# Altium PCB 电子脚铐便携式主控板V3-改版.PcbDoc (part 3 of 3)
Units mm, origin at the board's own origin, x right, y up, seen from the top; angles counter-clockwise.
Board outline 54 x 110 mm, 2 copper layers (Top Layer, Bottom Layer), stack 1.671 mm thick; 103 components, 64 nets, 340 pads, 43 vias.
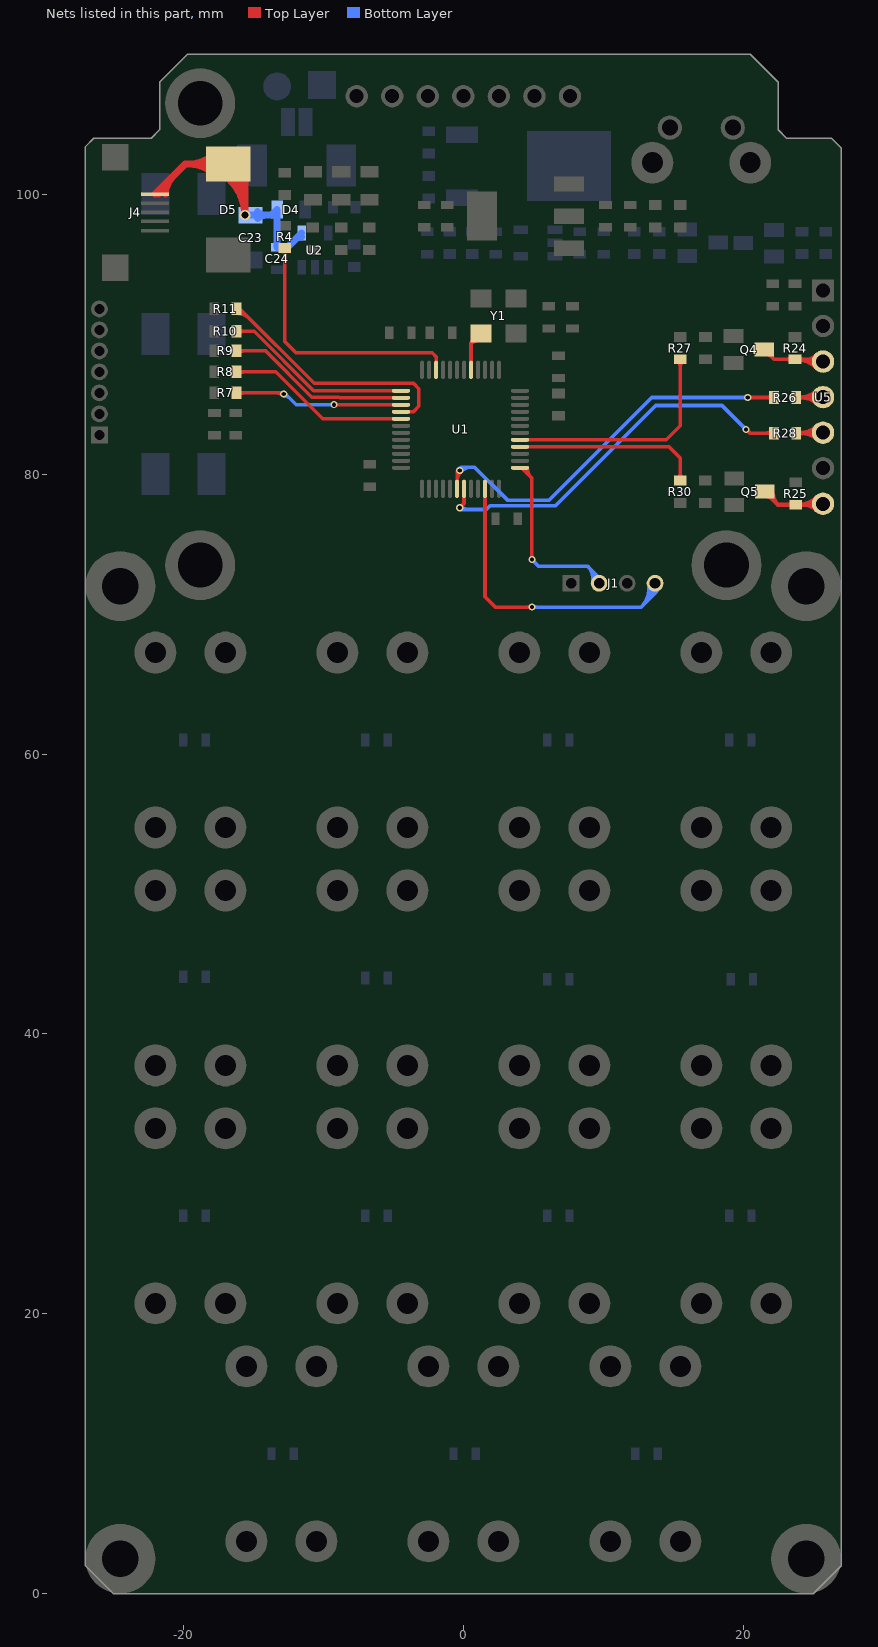
[diagram p3: the nets of this part, all layers, seen from the top]

## Via types
v1: diameter 0.508, hole 0.305, Top Layer to Bottom Layer, tented both sides, 29 vias
v2: diameter 0.762, hole 0.508, Top Layer to Bottom Layer, tented both sides, 14 vias

## Nets (pads, with @x,y where several pads share a name; then routed paths per layer and width w, separated by ;. In a path a pad name is that pad's centre, name@x,y a point inside that pad or via, vN(x,y) a via of type N, cw(c..) or ccw(c..) an arc to the next point about the centre after c; other vN are vias at no path point) (continued)
SETA: R27.2 U1.41 | length 17.5
  Top Layer w0.254: U1.41@4.05,82.45 14.505,82.45 15.5,83.445 R27.2@15.5,88.2 ; R27.2@15.342,88.042 cw(c14.962,87.662) 15.5,87.662 cw(c16.038,87.662) R27.2@15.658,88.042
SETAOUT: Q4.3 R24.1 U5.3 | length 11
  Top Layer w0.254: Q4.3@21.5,88.9 22.2,88.2 ; Q4.3@21.7,88.527 cw(c21.7,88.109) Q4.3@21.995,88.405 ; Q4.3@22.056,88.788 ccw(c22.613,88.613) 22.2,88.2 ; R24.1@23.442,88.042 ccw(c23.062,87.662) 23.062,88.2 ccw(c23.062,88.738) R24.1@23.442,88.358 ; R24.1@23.7,88.2 cw(c23.7,86.056) U5.3@25.222,87.566 ; R24.1@23.958,88.042 cw(c24.338,87.662) 24.338,88.2 cw(c24.338,88.738) R24.1@23.958,88.358 ; 24.31,88.2 cw(c24.31,86.661) U5.3@25.403,87.745 ; 24.462,88.2 ccw(c24.462,89.278) U5.3@25.224,88.516 ; U5.3@25.7,88.04 25.54,88.2 R24.1@23.7,88.2 22.2,88.2
SETB: R30.2 U1.40 | length 14.1
  Top Layer w0.254: U1.40@4.05,81.95 14.697,81.95 15.5,81.147 R30.2@15.5,79.7 ; R30.2@15.336,79.698 ccw(c14.941,80.093) 15.5,80.093 ; 15.5,80.064 ccw(c16.018,80.064) R30.2@15.652,79.698
SETBOUT: Q5.3 R25.1 U5.7 | length 10.7
  Top Layer w0.305: Q5.3@21.547,78.74 22.474,77.813 ; Q5.3@21.747,78.392 cw(c21.747,78.036) Q5.3@21.999,78.288 ; Q5.3@22.095,78.738 ccw(c23.39,78.729) 22.474,77.813 ; R25.1@23.509,77.673 ccw(c23.172,77.336) 23.172,77.813 ccw(c23.172,78.29) R25.1@23.509,77.953 ; R25.1@23.975,77.813 ccw(c23.975,79.605) U5.7@25.242,78.338 ; R25.1@23.989,77.673 cw(c24.326,77.336) 24.326,77.813 cw(c24.326,78.29) R25.1@23.989,77.953 ; 24.298,77.813 cw(c24.298,76.478) U5.7@25.242,77.422 ; 24.711,77.813 ccw(c24.711,78.869) U5.7@25.458,78.122 ; U5.7@25.7,77.88 25.633,77.813 R25.1@23.749,77.813 22.474,77.813
SPARE1: R4.2 U1.10 | length 19.7
  Top Layer w0.254: R4.2@-12.92,95.989 cw(c-13.3,95.609) -12.762,95.609 cw(c-12.224,95.609) R4.2@-12.604,95.989 ; R4.2@-12.762,96.147 -12.762,89.47 -11.96,88.668 -2.225,88.668 -1.95,88.393 U1.10@-1.95,87.45
SPI_DC: R10.1 U1.13 | length 14.4
  Top Layer w0.254: R10.1@-16.2,90.2 -14.949,90.2 -10.699,85.95 U1.13@-4.45,85.95 ; R10.1@-16.042,90.042 cw(c-15.662,89.662) -15.662,90.2 cw(c-15.662,90.738) R10.1@-16.042,90.358
SPI_MISO: R11.1 U1.16 | length 19.7
  Top Layer w0.254: R11.1@-16.2,91.477 cw(c-16.2,90.153) -15.264,91.089 ; R11.1@-16.2,91.731 cw(c-16.2,91.02) -15.697,91.523 ; R11.1@-16.2,91.8 -15.975,91.8 -10.662,86.487 -3.556,86.487 -3.175,86.106 -3.175,84.836 -3.561,84.45 U1.16@-4.45,84.45
SPI_MOSI: R8.1 U1.17 | length 14
  Top Layer w0.254: R8.1@-16.2,87.3 -13.4,87.3 -10.05,83.95 U1.17@-4.45,83.95 ; R8.1@-16.042,87.142 cw(c-15.662,86.762) -15.662,87.3 cw(c-15.662,87.838) R8.1@-16.042,87.458
SPI_RES: R9.1 U1.14 | length 14
  Top Layer w0.254: R9.1@-16.2,88.8 -14.124,88.8 -10.82,85.496 -8.89,85.496 -8.844,85.45 U1.14@-4.45,85.45 ; R9.1@-16.042,88.642 cw(c-15.662,88.262) -15.662,88.8 cw(c-15.662,89.338) R9.1@-16.042,88.958
SPI_SCK: R7.1 U1.15 | length 15
  Top Layer w0.254: R7.1@-16.2,85.8 -12.902,85.8 v1(-12.827,85.725) ; R7.1@-16.042,85.642 cw(c-15.662,85.262) -15.662,85.8 cw(c-15.662,86.338) R7.1@-16.042,85.958 ; -13.315,85.8 cw(c-13.315,85.237) v1@-12.917,85.635 ; v1(-9.237,84.963) -9.25,84.95 U1.15@-4.45,84.95 ; v1@-9.147,84.873 cw(c-8.962,84.688) -8.962,84.95 ; v1@-9.147,85.053 ccw(c-8.899,85.301) -8.899,84.95
  Bottom Layer w0.254: v1@-12.827,85.598 cw(c-12.827,84.985) -12.393,85.418 ; v1(-12.827,85.725) -12.827,85.852 -11.938,84.963 v1(-9.237,84.963) ; v1@-9.327,84.873 ccw(c-9.544,84.656) -9.544,84.963 ccw(c-9.544,85.27) v1@-9.327,85.053
SWCLK: J1.2 U1.37 | length 16.9
  Top Layer w0.254: U1.37@4.05,80.45 4.15,80.45 4.9,79.7 v1(4.9,73.9) ; U1.37@4.319,80.45 ccw(c4.727,80.45) 4.439,80.161 ; U1.37@4.573,80.45 ccw(c5.594,80.45) 4.872,79.728 ; v1@4.81,73.99 ccw(c4.593,74.207) 4.9,74.207 ccw(c5.207,74.207) v1@4.99,73.99
  Bottom Layer w0.254: v1@4.9,73.773 cw(c4.9,73.466) 5.117,73.683 cw(c5.334,73.9) v1@5.027,73.9 ; v1(4.9,73.9) 5.4,73.4 8.9,73.4 ; 9.236,73.064 cw(c8.592,72.42) J1.2@9.485,72.243 ; J1.2@9.236,72.292 ccw(c8.032,72.532) 8.9,73.4 ; J1.2@9.7,72.2 9.7,72.6 8.9,73.4
SWDIO: J1.4 U1.34 | length 28
  Top Layer w0.254: U1.34@1.55,78.95 1.55,71.225 2.275,70.5 v1(4.9,70.5) ; v1@4.81,70.41 ccw(c4.593,70.193) 4.593,70.5 ccw(c4.593,70.807) v1@4.81,70.59
  Bottom Layer w0.254: v1(4.9,70.5) 12.7,70.5 ; v1@4.99,70.41 cw(c5.207,70.193) 5.207,70.5 cw(c5.207,70.807) v1@4.99,70.59 ; 13.054,70.854 ccw(c11.975,71.934) J1.4@13.484,72.167 ; J1.4@13.233,72.128 cw(c11.361,71.839) 12.7,70.5 ; 13.409,71.209 ccw(c12.589,72.028) J1.4@13.735,72.205 ; J1.4@13.524,71.761 cw(c13.419,71.5) 13.7,71.5 ; J1.4@13.7,72.2 13.7,71.5 ; 13.763,71.563 ccw(c13.202,72.123) J1.4@13.986,72.244 ; J1.4@13.876,71.761 ccw(c13.981,71.5) 13.7,71.5 ; 12.7,70.5 13.7,71.5
TTL1_RX: R28.2 U1.31 | length 30.7
  Top Layer w0.254: v1(-0.254,77.597) 0.05,77.901 U1.31@0.05,78.95 ; v1@-0.254,77.724 ccw(c-0.254,78.031) -0.037,77.814 ccw(c0.18,77.597) v1@-0.127,77.597 ; v1@20.193,83.058 cw(c20.193,82.679) 20.461,82.947 ; v1@20.208,83.2 20.477,82.931 R28.2@22.187,82.931 ; v1@20.32,83.185 ccw(c20.554,83.185) 20.389,83.019 ; R28.2@22.029,82.773 ccw(c21.649,82.393) 21.649,82.931 ccw(c21.649,83.469) R28.2@22.029,83.089
  Bottom Layer w0.254: v1(-0.254,77.597) -0.127,77.47 1.641,77.47 1.911,77.74 6.585,77.74 13.746,84.9 18.478,84.9 v1(20.193,83.185) ; v1@-0.164,77.687 ccw(c0.359,78.21) 0.359,77.47 ; v1@20.066,83.185 ccw(c19.759,83.185) 19.976,83.402 ccw(c20.193,83.619) v1@20.193,83.312
TTL1_TX: R26.2 U1.30 | length 32.5
  Top Layer w0.254: U1.30@-0.45,78.95 -0.45,80.068 ; U1.30@-0.45,79.484 cw(c0.526,79.484) v1@-0.164,80.174 ; -0.45,80.097 cw(c-0.087,80.097) v1@-0.344,80.354 ; v1@-0.381,80.255 cw(c-0.619,80.237) -0.45,80.068 ; v1@-0.263,80.137 ccw(c-0.281,79.899) -0.45,80.068 ; v1(-0.254,80.264) -0.45,80.068 ; v1(20.32,85.471) R26.2@22.187,85.471 ; v1@20.41,85.381 cw(c20.627,85.164) 20.627,85.471 cw(c20.627,85.778) v1@20.41,85.561 ; R26.2@22.029,85.313 ccw(c21.649,84.933) 21.649,85.471 ccw(c21.649,86.009) R26.2@22.029,85.629
  Bottom Layer w0.254: v1@-0.344,80.354 cw(c0.009,80.001) 0.009,80.5 ; v1(-0.254,80.264) -0.018,80.5 0.8,80.5 3.154,78.146 6.146,78.146 13.471,85.471 v1(20.32,85.471) ; v1@-0.164,80.174 cw(c0.622,79.388) 0.622,80.5 ; v1@20.23,85.381 ccw(c20.013,85.164) 20.013,85.471 ccw(c20.013,85.778) v1@20.23,85.561
VBUS: C23.1 C24.1 D4.1 D5.1 J4.1 U2.4 | length 33.8
  Top Layer w0.508: J4.1@-22.021,100 -19.871,102.15 D5.1@-16.8,102.15 -15.6,100.95 v2(-15.6,98.5) ; J4.1@-21.783,100 cw(c-21.208,100) -21.615,100.406 ; J4.1@-21.275,100 cw(c-19.474,100) -20.748,101.274 ; D5.1@-17.854,101.446 ccw(c-19.555,99.745) -19.555,102.15 ccw(c-19.555,104.555) D5.1@-17.854,102.854 ; D5.1@-17.057,101.36 cw(c-19.331,98.402) v2@-15.6,98.402 ; D5.1@-16.747,101.763 cw(c-18.538,99.434) -15.6,99.434 ; D5.1@-16.438,102.166 cw(c-17.745,100.465) -15.6,100.465
  Bottom Layer w0.508: v2(-15.6,98.5) -13.7,98.5 D4.1@-13.3,98.9 C24.1@-13.3,96.2 -12.575,96.2 U2.4@-11.55,97.225 ; C23.1@-14.705,98.255 cw(c-14.115,97.665) -14.115,98.5 cw(c-14.115,99.335) C23.1@-14.705,98.745 ; -14.015,98.5 ccw(c-14.015,99.365) D4.1@-13.403,98.753 ; -12.013,96.762 cw(c-11.55,96.3) U2.4@-11.55,96.954
XTAL: U1.5 Y1.3 | length 4.1
  Top Layer w0.305: U1.5@0.55,87.45 0.55,89.35 ; Y1.3@0.678,89.892 cw(c0.175,89.725) 0.55,89.35 ; Y1.3@1.108,89.554 ccw(c1.049,88.851) 0.55,89.35 ; Y1.3@1.25,90.05 0.55,89.35
YL_RX: R26.1 U5.4 | length 5.8
  Top Layer w0.305: R26.1@23.787,85.471 U5.4@25.671,85.471 ; R26.1@23.927,85.331 cw(c24.264,84.994) 24.264,85.471 cw(c24.264,85.948) R26.1@23.927,85.611 ; R26.1@24.067,85.471 ccw(c24.067,87.133) U5.4@25.242,85.958 ; 24.207,85.471 cw(c24.207,84.007) U5.4@25.242,85.042 ; 24.802,85.471 ccw(c24.802,86.398) U5.4@25.458,85.742
YL_TX: R28.1 U5.5 | length 5.8
  Top Layer w0.305: R28.1@23.787,82.931 U5.5@25.671,82.931 ; R28.1@23.927,82.791 cw(c24.264,82.454) 24.264,82.931 cw(c24.264,83.408) R28.1@23.927,83.071 ; R28.1@24.067,82.931 ccw(c24.067,84.593) U5.5@25.242,83.418 ; 24.207,82.931 cw(c24.207,81.467) U5.5@25.242,82.502 ; 24.802,82.931 ccw(c24.802,83.858) U5.5@25.458,83.202
pads on no net: J3.3 J3.4 J4.2 J4.3 J4.4 R5.1 S16.0 U1.2 U1.3 U1.4 U1.6 U5.6 Y1.1

## Keep-outs
Keep-Out Layer:
  the board outline again, w0.127

## Other copper
Bottom Layer:
  rectangle net GND: -3.671,95.504 -2.54,96.012

## Silkscreen, mask and mechanical layers (free items; w line width, h text height)
Top Overlay:
  text "+" at 4.4,71.5 h1.52
Bottom Overlay:
  lines w4.5: -20,80 -20,110
  text "-" at -14.3,108.1 h1.52
  text "+" at -7.7,108.1 h1.52
  text "+" at 4.4,71.5 h1.52